# Allegro board INSOLADORA_COMPONENTS.brd
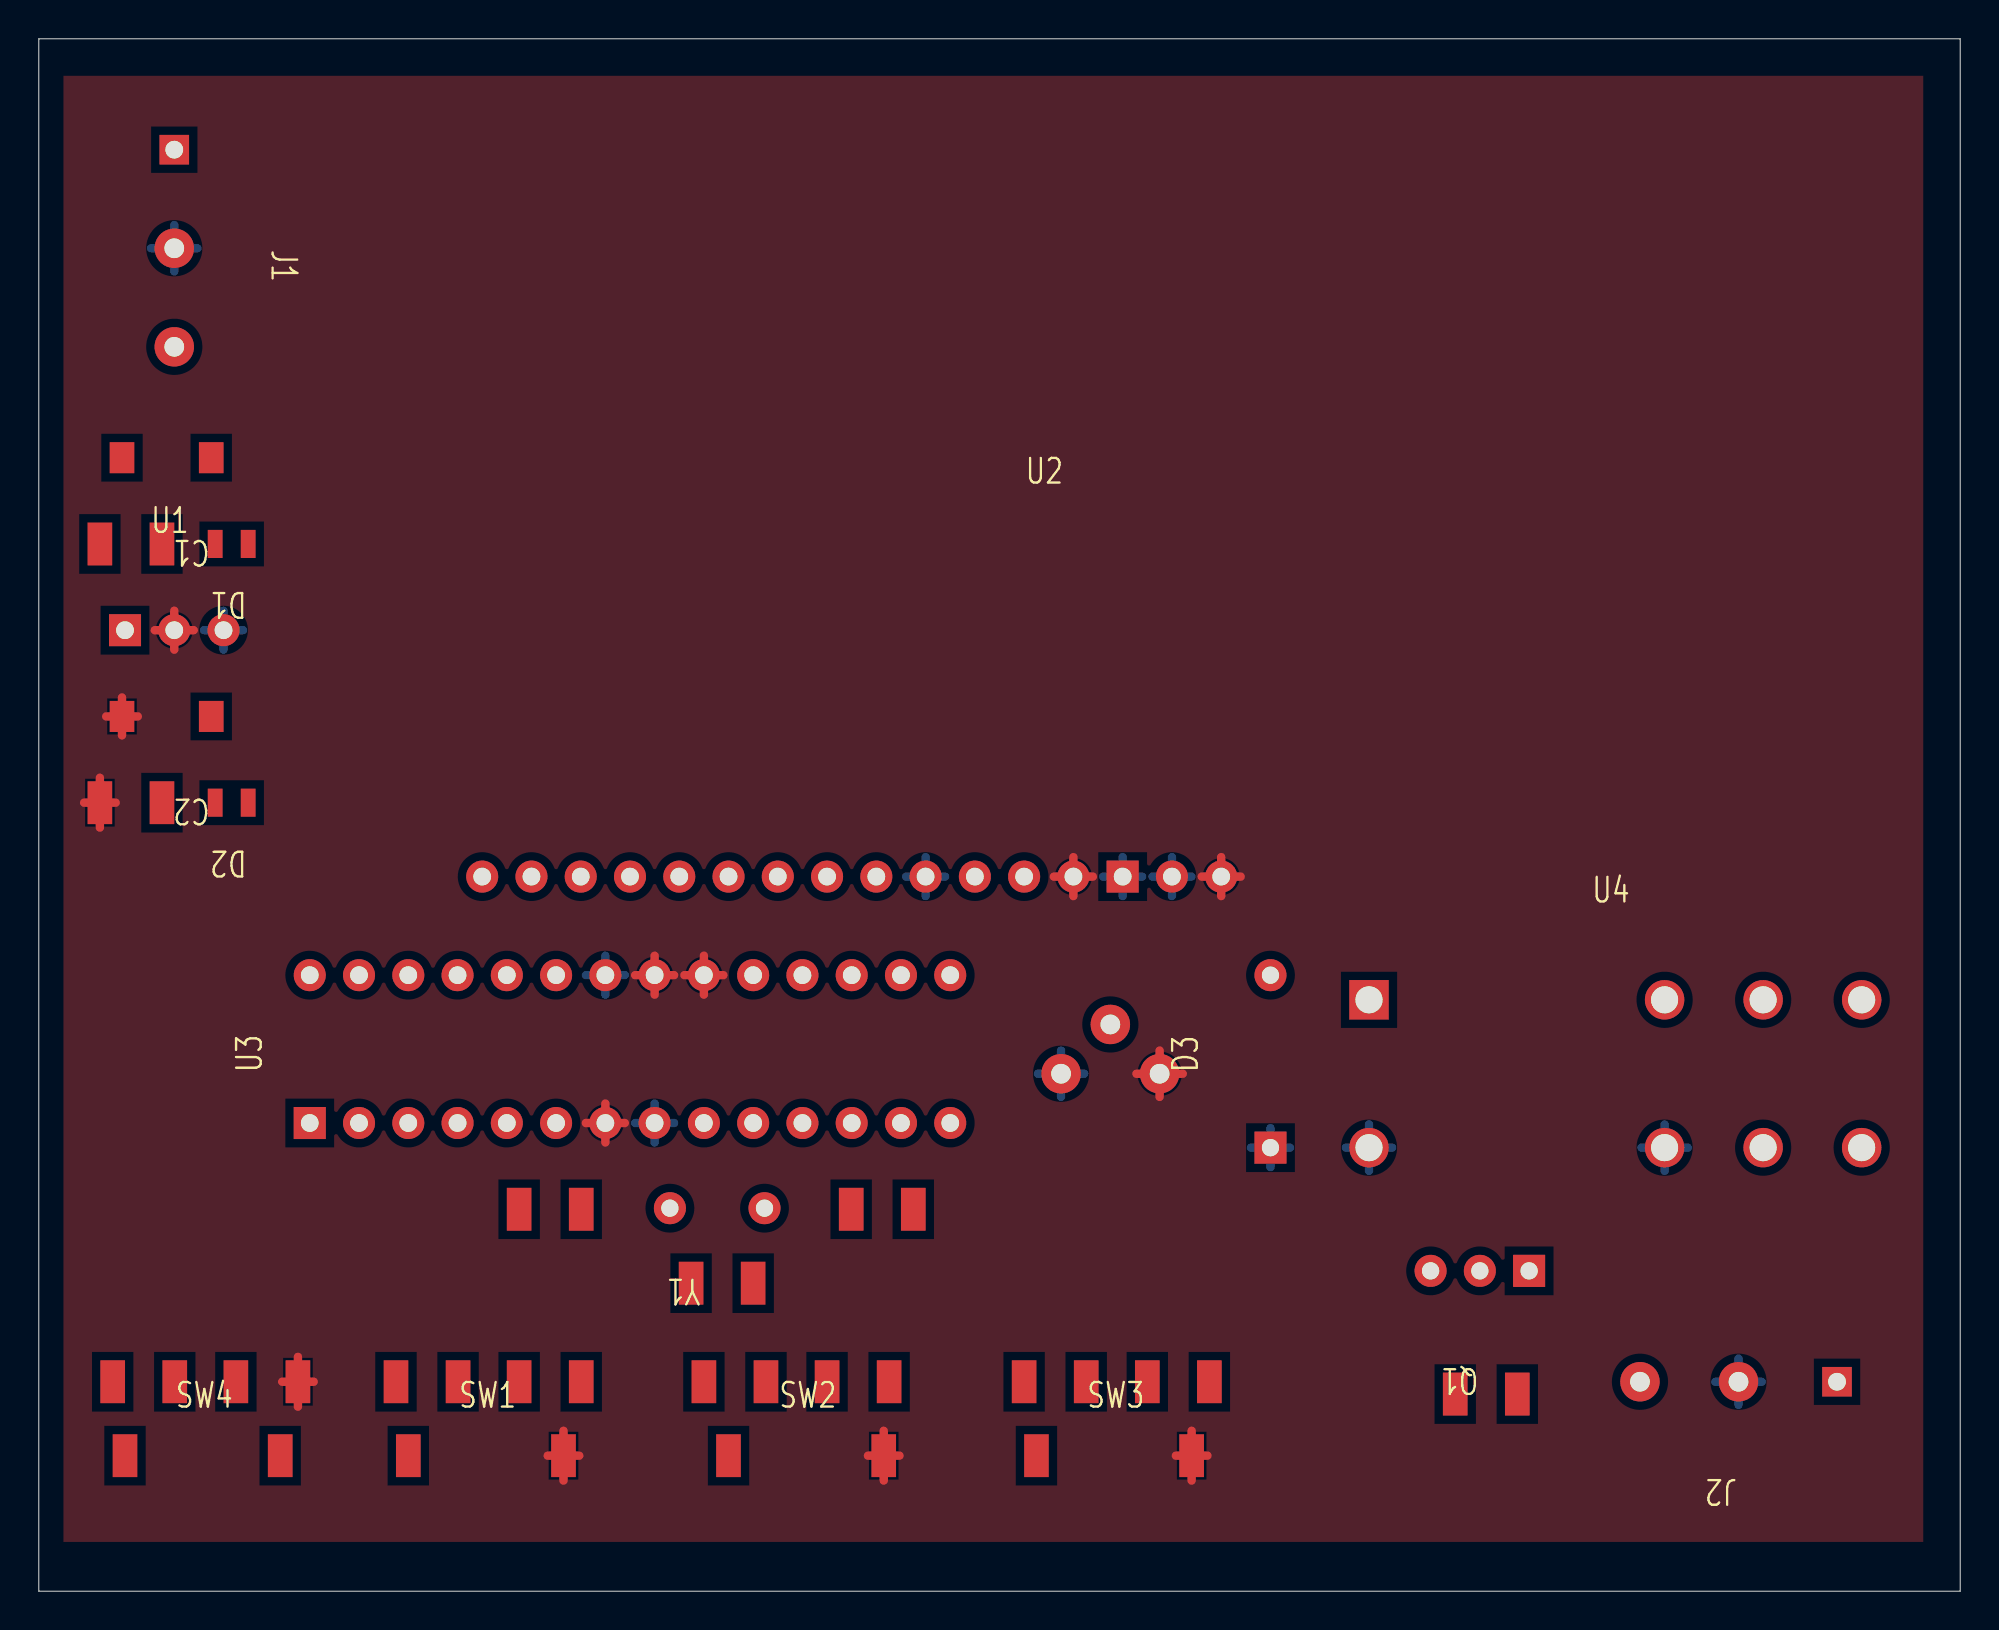
[diagram p0: board, top side]
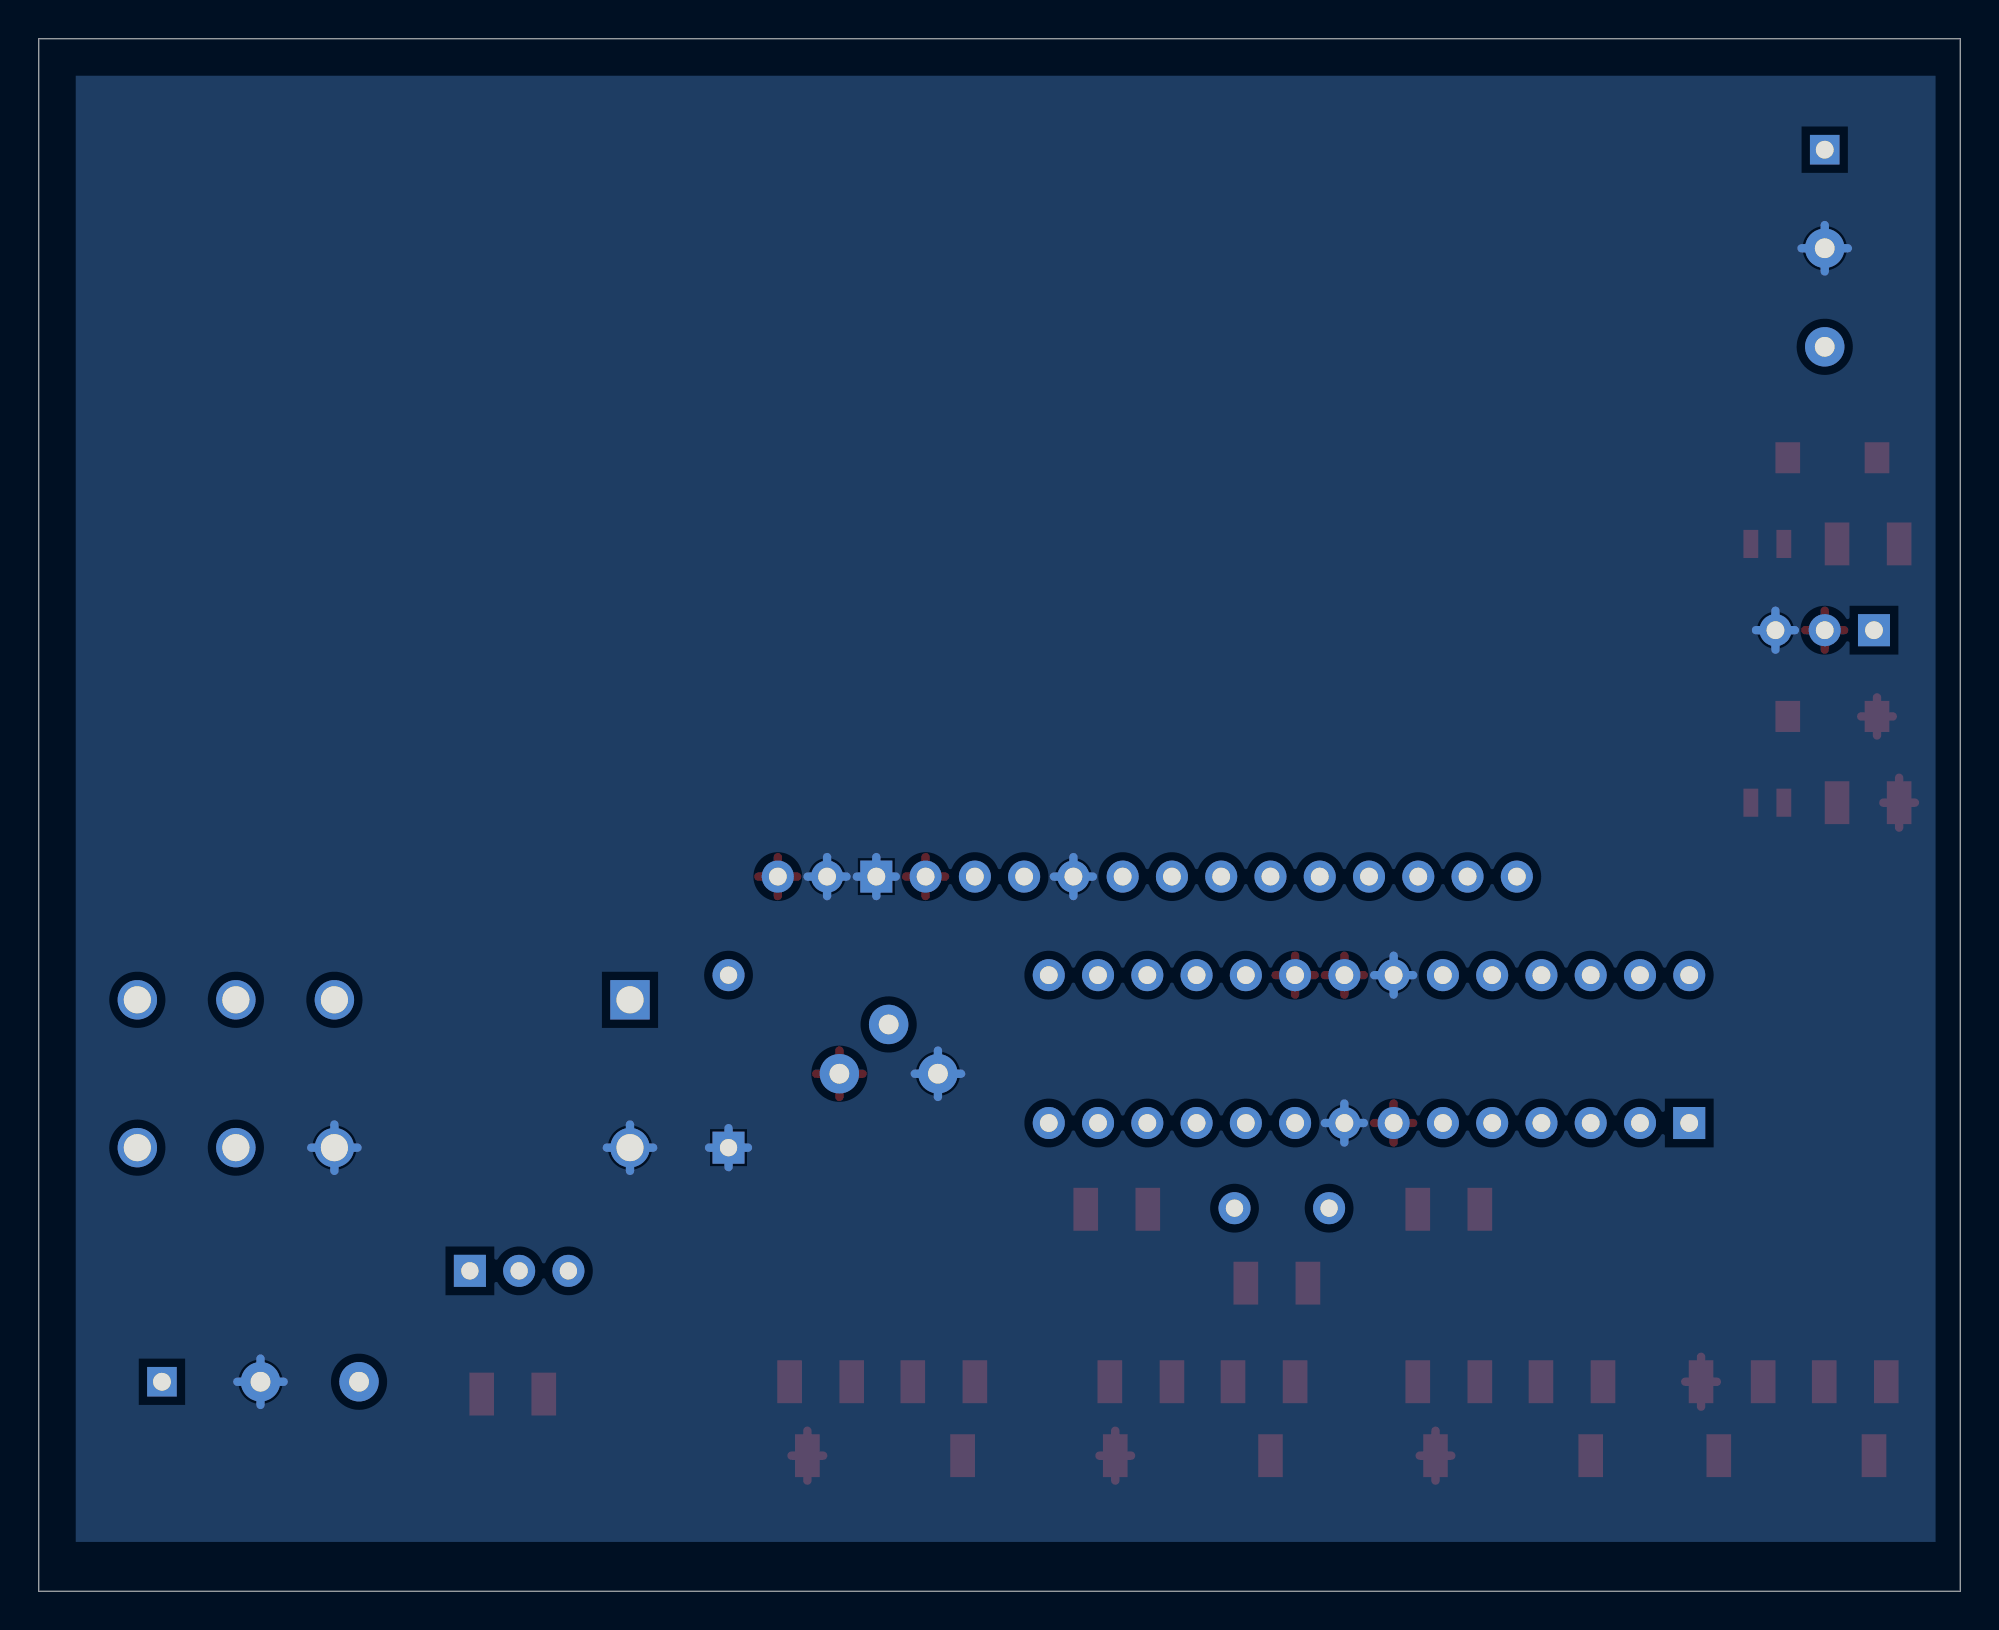
[diagram p1: board, bottom side, seen from below]

Outline 99.06 x 80.01 mm; copper layers: TOP, BOTTOM. Coordinates in mm from the lower left corner of the outline.
Outline path: 0,80.01 99.06,80.01 99.06,0 0,0 0,80.01

## Placement (name value [footprint] x y rotation side)
C1  0.33u  [SMD_CAPHB]  8.89 58.42 180 top
C2  0.1u  [SMD_CAPHB]  8.89 45.09 180 top
C3  100n  [SMDCAP_126X63]  3.81 10.8 0 top
C4  100n  [SMDCAP_126X63]  18.42 10.8 0 top
C5  100n  [SMDCAP_126X63]  40.64 10.8 0 top
C6  100n  [SMDCAP_126X63]  57.15 10.8 0 top
C7  22p  [SMDCAP_126X63]  24.77 19.69 0 top
C8  22p  [SMDCAP_126X63]  45.09 19.69 180 top
D1  1N6266/TO  [SMDLED_67X35]  10.8 53.98 180 top
D2  1N6266/TO  [SMDLED_67X35]  10.8 40.64 180 top
D3  d  [DIODO_350]  63.5 22.86 90 top
J1  POWER  [CON3]  6.98 74.3 270 top
J2  LEDS_UV  [CON3]  92.71 10.8 180 top
Q1  -  [BC547B]  76.84 16.51 180 top
R1  1k  [SMDRES_126X63]  6.35 40.64 180 top
R2  1k  [SMDRES_126X63]  6.35 53.98 180 top
R3  10k  [POT_MULTI]  52.7 26.67 0 top
R4  10k  [SMDRES_126X63]  10.16 10.8 0 top
R5  220  [SMDRES_126X63]  24.77 10.8 0 top
R6  220  [SMDRES_126X63]  34.29 10.8 0 top
R7  220  [SMDRES_126X63]  50.8 10.8 0 top
R8  1k  [SMDRES_126X63]  36.83 15.88 180 top
R9  10k  [SMDRES_126X63]  73.03 10.16 0 top
SW1  SW PUSHBUTTON  [SMD_PUSHBUTTON]  19.05 6.98 0 top
SW2  SW PUSHBUTTON  [SMD_PUSHBUTTON]  35.56 6.98 0 top
SW3  SW PUSHBUTTON  [SMD_PUSHBUTTON]  51.44 6.98 0 top
SW4  SW PUSHBUTTON  [SMD_PUSHBUTTON]  4.45 6.98 0 top
U1  LM7805C  [LM7805]  4.45 49.53 0 top
U2  LMB162H  [LMB162H_LCD]  55.88 36.83 0 top
U3  -  [ATMEGA328P]  13.97 24.13 90 top
U4  -  [RZ03_1C4_D005]  68.58 30.48 0 top
Y1  CRYSTAL 16 MHz  [CRISTAL16MHZ]  40.64 21.59 180 top

## Library data of the parts
C1 C2 = C_elect_0
C3-C8 = C
D1 D2 = 1N6266/TO_0
D3 = d_0
J1 J2 = CON3
Q1 = BC547B
R1 R2 R4-R9 = R
R3 = POT
SW1-SW4 = SW PUSHBUTTON
U1 = LM7805C
U2 = LMB162H_LCD_0
U3 = ATMEGA328P
U4 = RZ03_1C4_D005
Y1 = CRYSTAL

## Footprints (pads in the part's own frame, mm; a bottom-side part is the same pattern mirrored in y, then rotated)
ATMEGA328P
  rect 1.651x1.651 hole 0.914: 1(0,0)
  round 1.651 hole 0.914: 2(0,-2.54) 3(0,-5.08) 4(0,-7.62) 5(0,-10.16) 6(0,-12.7) 7(0,-15.24) 8(0,-17.78) 9(0,-20.32) 10(0,-22.86) 11(0,-25.4) 12(0,-27.94) 13(0,-30.48) 14(0,-33.02) 15(7.62,-33.02) 16(7.62,-30.48) 17(7.62,-27.94) 18(7.62,-25.4) 19(7.62,-22.86) 20(7.62,-20.32) 21(7.62,-17.78) 22(7.62,-15.24) 23(7.62,-12.7) 24(7.62,-10.16) 25(7.62,-7.62) 26(7.62,-5.08) 27(7.62,-2.54) 28(7.62,0)
BC547B
  rect 1.651x1.651 hole 0.889: 1(0,0)
  round 1.651 hole 0.889: 2(2.54,0) 3(5.08,0)
CON3
  rect 1.524x1.524 hole 0.914: 1(0,0)
  round 2.032 hole 1.016: 2(5.08,0) 3(10.16,0)
CRISTAL16MHZ
  round 1.651 hole 0.889: 1(3.226,1.85) 2(8.103,1.85)
DIODO_350
  rect 1.651x1.651 hole 0.889: 1(0,0)
  round 1.651 hole 0.889: 2(8.89,0)
LM7805
  rect 1.651x1.651 hole 0.914: 1(0,0)
  round 1.651 hole 0.914: 2(2.54,0) 3(5.08,0)
LMB162H_LCD
  rect 1.651x1.651 hole 0.914: 1(0,0)
  round 1.651 hole 0.914: 2(-2.54,0) 3(-5.08,0) 4(-7.62,0) 5(-10.16,0) 6(-12.7,0) 7(-15.24,0) 8(-17.78,0) 9(-20.32,0) 10(-22.86,0) 11(-25.4,0) 12(-27.94,0) 13(-30.48,0) 14(-33.02,0) 15(5.08,0) 16(2.54,0)
POT_MULTI
  round 2.032 hole 1.016: 1(0,0) 2(2.54,2.54) 3(5.08,0)
RZ03_1C4_D005
  rect 2.032x2.032 hole 1.397: 1(0,0)
  round 2.032 hole 1.397: 2(15.24,0) 3(20.32,0) 4(25.4,0) 5(25.4,-7.62) 6(20.32,-7.62) 7(15.24,-7.62) 8(0,-7.62)
SMD_CAPHB
  rect 1.27x1.6 smd: 1(0,0) 2(4.6,0)
SMD_PUSHBUTTON
  rect 1.27x2.21 smd: 1(0,0) 2(8.001,0)
SMDCAP_126X63
  rect 1.27x2.21 smd: 1(0,0) 2(3.2,0)
SMDLED_67X35
  rect 0.762x1.448 smd: 1(0,0) 2(1.702,0)
SMDRES_126X63
  rect 1.27x2.21 smd: 1(0,0) 2(3.2,0)

## Nets
VCC: C2.2(+) R1.2 R3.3(2) R4.2 SW1.2 SW2.2 SW3.2 U1.2(OUT) U2.2(VDD) U2.15(BLK) U3.7(VCC) U3.20(AVCC) U3.21(AREF)
0: C1.1(-) C2.1(-) C3.1 C4.1 C5.1 C6.1 C7.1 C8.1 D1.1(CATHODE) D2.1(CATHODE) D3.1 J1.2 J2.2 R3.1 R5.1 R6.1 R7.1 SW4.1 U1.3(GND) U2.1(VSS) U2.5(R/W) U2.16(BLA) U3.8(GND1) U3.22(GND2) U4.7(12) U4.8(A2)
ATM_RSTN: C3.2 R4.1 SW4.2 U3.1(PC6)
CONTRAST: R3.2(T) U2.3(VO)
DATA_EN: U2.6(E) U3.14(PB0)
DB4: U2.11(DB4) U3.15(PB1)
DB5: U2.12(DB5) U3.16(PB2)
DB6: U2.13(DB6) U3.17(PB3)
DB7: U2.14(DB7) U3.18(PB4)
MIN: C4.2 R5.2 SW1.1 U3.4(PD2)
POWER: C1.2(+) J1.1 Q1.1(C) R2.2 U1.1(IN) U4.5(14)
POWER_LEDS: J2.1 U4.6(11)
REG_SEL: U2.4(RS) U3.13(PD7)
RELAY_CNTRL: R9.1 U3.19(PB5)
RELAY_CURRENT: D3.2 Q1.3(E) U4.1(A1)
SEG: C5.2 R6.2 SW2.1 U3.5(PD3)
START: C6.2 R7.2 SW3.1 U3.6(PD4)
XTAL1: C7.2 R8.2 U3.9(PB6) Y1.2
XTAL2: C8.2 R8.1 U3.10(PB7) Y1.1
N416775: Q1.2(B) R9.2
N4105391: D2.2(ANODE) R1.1
N4184300: D1.2(ANODE) R2.1

Pads without a net: J1 3; J2 3; U2 7 8 9 10; U3 2 3 11 12 23 24 25 26 27 28; U4 2 3 4

## Routing (per net, layer and track width the routed paths; a pad name or vN(x,y) marks a point on that pad's centre or on a via; arc(x,y) is an arc through that point)
VCC: length 53.4
  TOP w0.432: 57.79,26.67 58.98,26.67 ; 57.79,26.67 57.79,27.86 ; 57.79,26.67 56.59,26.67 ; 57.79,26.67 57.79,25.48 ; 6.98,48.53 U1.2 ; U1.2 5.98,49.53 ; U1.2 6.98,50.53 ; U1.2 7.99,49.53 ; SW3.2 59.44,8.27 ; SW3.2 58.62,6.98 ; SW3.2 60.25,6.98 ; SW3.2 59.44,5.7 ; 28.21,24.13 U3.7 ; U3.7 29.21,25.13 ; U3.7 30.21,24.13 ; U3.7 29.21,23.13 ; 3.15,39.36 R1.2 ; R1.2 3.15,41.92 ; R1.2 2.34,40.64 ; R1.2 3.96,40.64 ; 42.75,6.98 43.56,6.98 ; 43.56,6.98 44.37,6.98 ; 43.56,6.98 43.56,5.7 ; 43.56,6.98 43.56,8.27 ; U3.21 32.75,31.75 ; U3.21 30.75,31.75 ; U3.21 31.75,30.75 ; U3.21 31.75,32.75 ; 60.96,35.83 U2.15 ; U2.15 61.96,36.83 ; U2.15 59.96,36.83 ; U2.15 60.96,37.83 ; 34.29,30.75 U3.20 ; U3.20 35.29,31.75 ; U3.20 34.29,32.75 ; U3.20 33.29,31.75 ; R4.2 14.17,10.8 ; R4.2 13.36,9.51 ; R4.2 12.55,10.8 ; R4.2 13.36,12.08 ; SW1.2 27.86,6.98 ; SW1.2 26.24,6.98 ; SW1.2 27.05,8.27 ; SW1.2 27.05,5.7 ; U2.2 54.34,36.83 ; U2.2 53.34,37.83 ; U2.2 52.34,36.83 ; U2.2 53.34,35.83 ; 3.48,45.09 C2.2 ; C2.2 4.29,44.11 ; C2.2 5.1,45.09 ; C2.2 4.29,46.06
0: length 52
  BOTTOM w0.432: U3.22 30.21,31.75 ; U3.22 29.21,32.75 ; U3.22 29.21,30.75 ; U3.22 28.21,31.75 ; U3.8 31.75,25.13 ; U3.8 31.75,23.13 ; U3.8 32.75,24.13 ; U3.8 30.75,24.13 ; 44.72,36.83 U2.5 ; U2.5 45.72,37.83 ; U2.5 46.72,36.83 ; U2.5 45.72,35.83 ; 82.63,22.86 U4.7 ; U4.7 85.01,22.86 ; U4.7 83.82,24.05 ; U4.7 83.82,21.67 ; U2.16 59.42,36.83 ; U2.16 58.42,35.83 ; U2.16 57.42,36.83 ; U2.16 58.42,37.83 ; U2.1 56.88,36.83 ; U2.1 55.88,37.83 ; U2.1 54.88,36.83 ; U2.1 55.88,35.83 ; 68.58,21.67 U4.8 ; U4.8 67.39,22.86 ; U4.8 69.77,22.86 ; U4.8 68.58,24.05 ; 6.98,68.02 J1.2 ; J1.2 8.18,69.22 ; J1.2 6.98,70.41 ; J1.2 5.79,69.22 ; 62.5,22.86 D3.1 ; D3.1 64.5,22.86 ; D3.1 63.5,21.86 ; D3.1 63.5,23.86 ; J2.2 87.63,11.99 ; J2.2 87.63,9.6 ; J2.2 86.44,10.8 ; J2.2 88.82,10.8 ; U1.3 9.52,50.53 ; U1.3 8.52,49.53 ; U1.3 9.52,48.53 ; U1.3 10.53,49.53 ; R3.1 53.9,26.67 ; R3.1 52.7,27.86 ; R3.1 52.7,25.48 ; R3.1 51.51,26.67

## Copper pours and planes (outline as drawn; the poured copper is in the pictures)
VCC on TOP: 1.27,2.54 1.27,78.1 97.15,78.1 97.15,2.54
0 on BOTTOM: 2.54,2.54 1.27,2.54 1.27,78.11 97.16,78.11 97.16,2.54 96.52,2.54
